# EAGLE board Simkb (EAGLE 6.6.0)
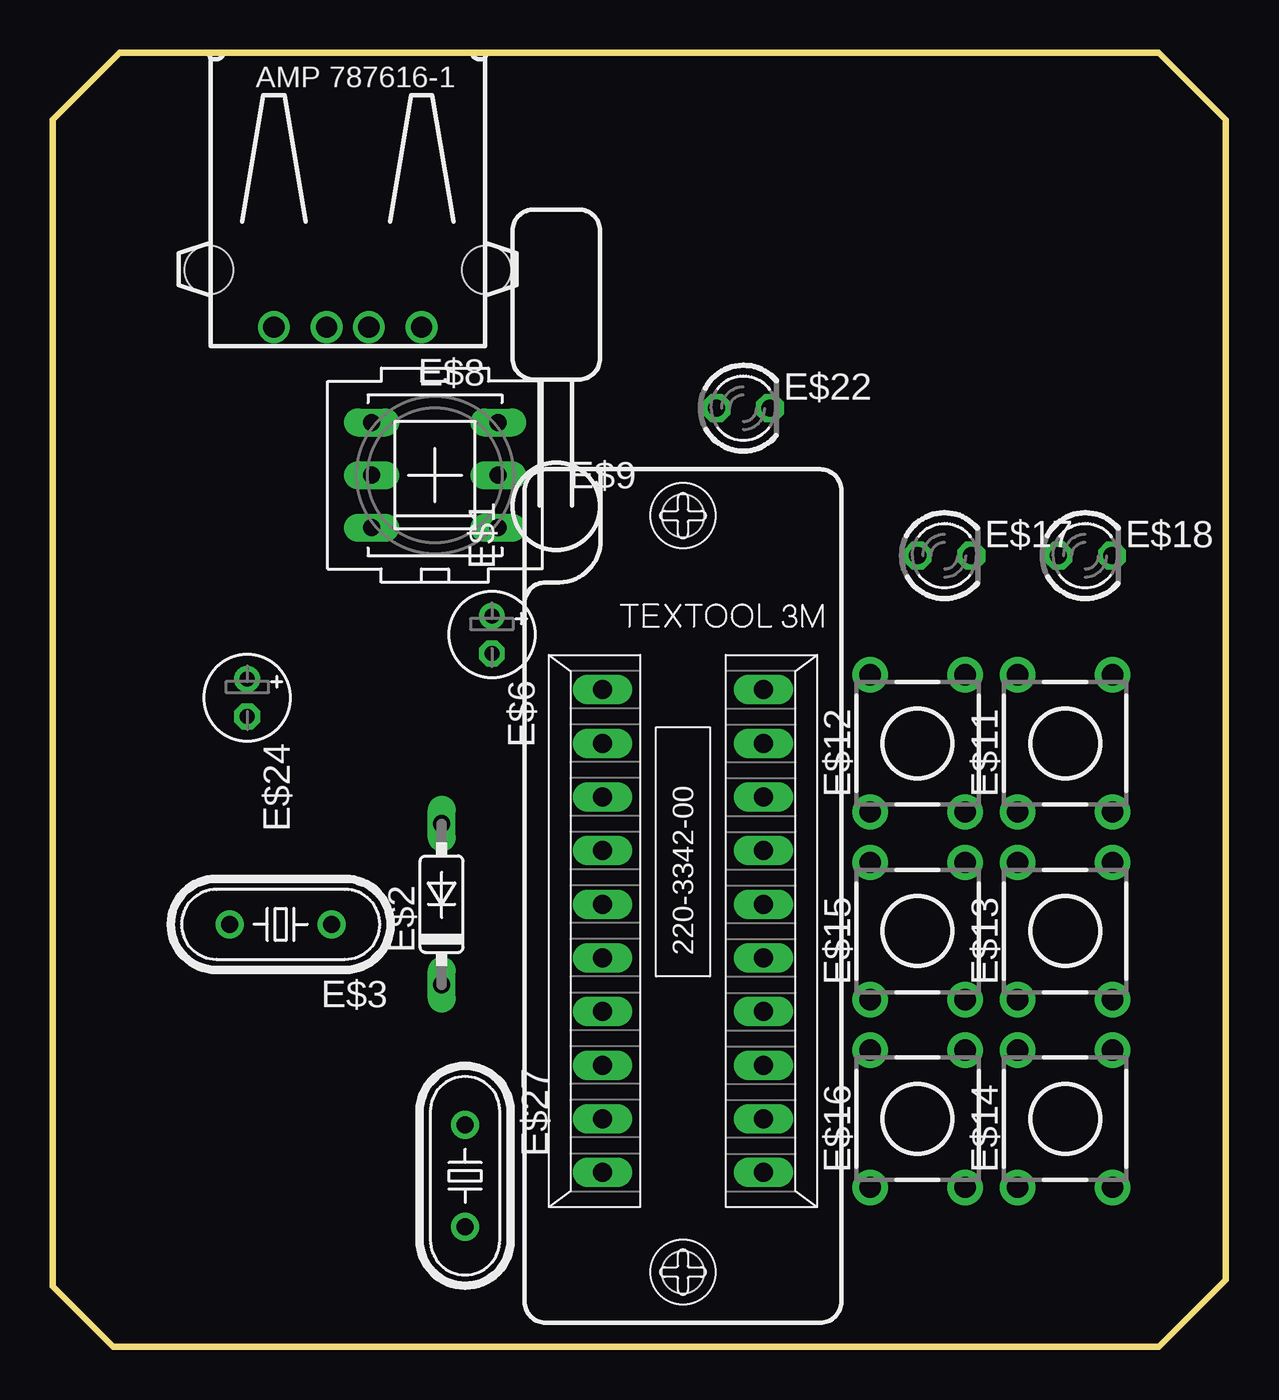
[diagram p0: board, top side]
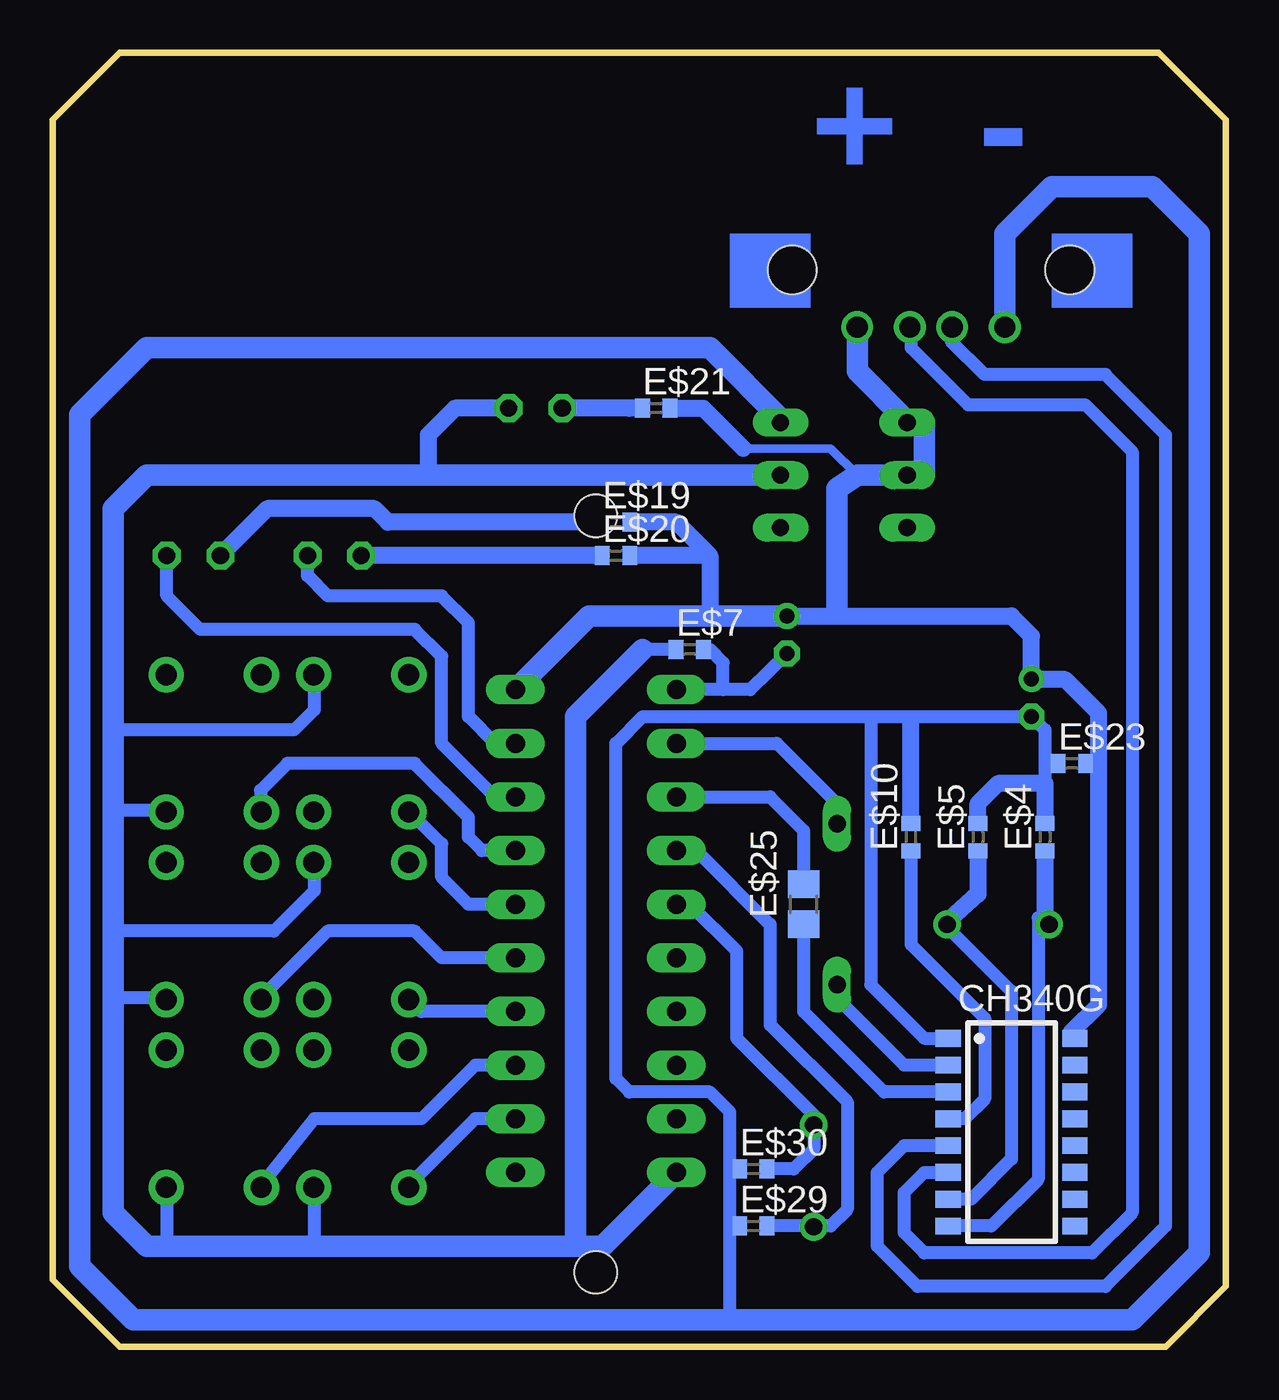
[diagram p1: board, bottom side, seen from below]

Size 55.56 x 61.28 mm. Coordinates in mm from the lower left corner, seen from the top.
Outline: 3.17,61.28 52.39,61.28 55.56,58.1 55.56,3.18 52.39,0 2.86,0 0,2.86 0,58.1 3.17,61.28
Copper layers (1*16): Top 0.035mm / dielectric 1.5mm / Bottom 0.035mm
Design rules "default": minimum track width 10mil, minimum drill 24mil, track to track 8mil, track to pad 8mil, pad to pad 8mil, via to via 8mil, smd to smd 8mil, copper to edge 40mil, drill to drill 8mil, minimum pad ring 10mil, minimum via ring 8mil, stop-mask expansion 4mil, vias tented up to drill 0mil, thermal gap 10mil
Net classes: 0 default: clearance 0.205 mm

## Footprints (pad centres in the part's own frame; a part is rotated, then mirrored left to right if it is on the bottom)
SOP16 = smd 0.8 x 1.2: 1 -4.445,-3; 2 -3.175,-3; 3 -1.905,-3; 4 -0.635,-3; 5 0.635,-3; 6 1.905,-3; 7 3.175,-3; 8 4.445,-3; 9 4.445,3; 10 3.175,3; 11 1.905,3; 12 0.635,3; 13 -0.635,3; 14 -1.905,3; 15 -3.175,3; 16 -4.445,3
220-3342-00-0602J = drill 0.9 long: 1 -11.43,-3.81; 2 -8.89,-3.81; 3 -6.35,-3.81; 4 -3.81,-3.81; 5 -1.27,-3.81; 6 1.27,-3.81; 7 3.81,-3.81; 8 6.35,-3.81; 9 8.89,-3.81; 10 11.43,-3.81; 11 11.43,3.81; 12 8.89,3.81; 13 6.35,3.81; 14 3.81,3.81; 15 1.27,3.81; 16 -1.27,3.81; 17 -3.81,3.81; 18 -6.35,3.81; 19 -8.89,3.81; 20 -11.43,3.81 | hole 2: 16.16,0; -19.66,0
DO35-7 = drill 0.813 long: A 3.81,0; C -3.81,0
HC49/S = drill 0.813: 1 -2.413,0; 2 2.413,0
C0402 = smd 0.7 x 0.9: 1 -0.65,0; 2 0.65,0
E1,8-4 = drill 0.711 pad 1.168: + -0.889,0 | drill 0.711 pad 1.168 octagon: - 0.889,0
R0402 = smd 0.7 x 0.9: 1 -0.65,0; 2 0.65,0
USB = drill 1: 1 -3.5,12.99; 2 -1,12.99; 3 1,12.99; 4 3.5,12.99 | hole 2.3: -6.57,10.28; 6.57,10.28
PVA2R = drill 0.813 long: 1 -2.997,2.489; 2 -2.997,0; 3 -2.997,-2.489; 4 2.997,2.489; 5 2.997,0; 6 2.997,-2.489
TL1105 = drill 1 pad 1.676: 1 -2.25,3.25; 2 2.25,3.25; 3 -2.25,-3.25; 4 2.25,-3.25
LED3MM = drill 0.813 octagon: A -1.27,0; K 1.27,0
C1005 = smd 0.7 x 0.9: 1 -0.65,0; 2 0.65,0
R0805 = smd 1.3 x 1.5: 1 -0.95,0; 2 0.95,0

## Placement (x,y rotation side)
CH340G  [SOP16]  10.16,10.16 270 bottom
E$1  [220-3342-00-0602J]  29.84,19.69 270 top
E$2  [DO35-7]  18.41,20.96 90 top
E$3  [HC49/S]  10.79,20 180 top
E$4  [C0402]  8.57,24.13 90 bottom
E$5  [C0402]  11.75,24.13 90 bottom
E$6  [E1,8-4]  20.8,33.72 270 top
E$7  [R0402]  25.4,33.02 0 bottom
E$8  [USB]  13.97,61.28 180 top
E$9  [PVA2R]  18.1,41.27 0 top
E$10  [C0402]  14.92,24.13 90 bottom
E$11  [TL1105]  47.94,28.57 0 top
E$12  [TL1105]  40.96,28.57 0 top
E$13  [TL1105]  47.94,19.69 0 top
E$14  [TL1105]  47.94,10.79 0 top
E$15  [TL1105]  40.96,19.69 0 top
E$16  [TL1105]  40.96,10.79 0 top
E$17  [LED3MM]  42.23,37.47 0 top
E$18  [LED3MM]  48.89,37.47 0 top
E$19  [R0402]  28.89,39.05 0 bottom
E$20  [R0402]  28.89,37.47 0 bottom
E$21  [R0402]  26.99,44.45 0 bottom
E$22  [LED3MM]  32.7,44.45 0 top
E$23  [C1005]  7.3,27.62 0 bottom
E$24  [E1,8-4]  9.21,30.73 270 top
E$25  [R0805]  20,20.96 90 bottom
E$27  [HC49/S]  19.53,8.1 270 top
E$29  [C0402]  22.38,5.71 0 bottom
E$30  [C0402]  22.38,8.41 0 bottom

## Library data of the parts
CH340G = relay
E$1 = con-3m
E$2 = diode
E$3 E$27 = crystal
E$4 E$5 E$7 E$10 E$19-E$21 E$23 E$25 E$29 E$30 = eagle-ltspice
E$6 E$24 = rcl
E$8 = con-amp
E$9 = switch-misc
E$11-E$16 = switch
E$17 E$18 E$22 = led

## Nets
S$11: E$17.A
S$13: E$17.K
S$15: E$1.4
S$19: E$18.K
S$20: E$18.A
S$21: E$22.A
S$23: E$2.A
S$25: E$2.C
S$27: E$6.-
S$28: E$22.K
S$30: E$6.+ E$24.+
S$31: E$1.5
S$32: E$24.-

## Tracks (layer width: path | path; a pad name or v marks a point on that pad's centre or on a via)
S$1
  Bottom 1.016: 20.95,43.81 24.45,47.31 51.12,47.31 54.29,44.13 54.29,3.81 51.75,1.27 4.45,1.27 1.27,4.45 1.27,52.7 3.49,54.93 8.26,54.93 10.48,52.7 10.48,48.26
S$2
  Bottom 1.016: 14.29,41.27 14.29,43.81 15.08,43.81 17.46,46.2 17.46,48.26
S$3
  Bottom 0.61: 8.89,20.32 8.89,7.94 11.11,5.72 13.33,5.72
S$4
  Bottom 0.61: 33.66,10.79 35.56,10.79 38.74,7.62
S$5
  Bottom 0.61: 33.66,13.34 35.56,13.34 38.1,10.79 43.18,10.79 45.72,7.62
S$6
  Bottom 0.61: 33.66,15.87 38.1,15.87 38.74,16.51
S$7
  Bottom 0.61: 33.66,18.41 37.15,18.41 38.42,19.69 42.55,19.69 45.72,16.51
S$8
  Bottom 0.61: 33.66,20.96 35.88,20.96 37.15,22.23 37.15,23.81 38.74,25.4
S$9
  Bottom 0.61: 33.66,23.5 35.24,23.5 35.88,24.13 35.88,25.08 38.42,27.62 44.45,27.62 45.72,26.35 45.72,25.4
S$10
  Bottom 0.406: 26.35,44.45 26.03,44.45 | 22.86,42.55 18.73,42.55 17.46,41.27
  Bottom 0.813: 26.03,44.45 25.72,44.45 24.76,44.45 22.86,42.55
  Bottom 1.016: 14.29,41.27 17.46,41.27 18.42,40.64 18.42,34.92
S$11
  Bottom 0.813: 29.85,37.47 E$17.A
S$12
  Bottom 0.61: 8.57,29.21 8.57,26.67
  Bottom 0.813: 11.75,24.92 11.75,25.72 10.79,26.67 8.57,26.67 8.57,24.92
S$13
  Bottom 0.61: 33.66,28.57 34.61,28.57 35.88,29.84 35.88,34.29 37.15,35.56 42.55,35.56 43.5,36.51 E$17.K
S$14
  Bottom 0.61: 26.03,26.03 21.59,26.03 20,24.45 20,22.07
S$15
  Bottom 0.61: E$1.4 25.08,23.5 21.59,20 21.59,15.24 17.94,11.59 17.94,6.51 18.73,5.72 21.59,5.72
S$16
  Bottom 0.61: 14.92,23.18 14.92,19.05 11.43,15.56 11.43,11.75 12.38,10.79 13.33,10.79
S$17
  Bottom 0.61: 13.02,48.26 13.02,47.62 11.43,46.04 5.71,46.04 2.86,43.18 2.86,5.72 5.71,2.86 14.6,2.86 16.51,4.76 16.51,8.26 15.24,9.52 13.65,9.52
S$18
  Bottom 0.61: 14.92,48.26 14.92,47.31 12.22,44.61 6.67,44.61 4.45,42.39 4.45,6.35 6.35,4.45 14.29,4.45 15.24,5.4 15.24,7.3 14.29,8.26 13.33,8.26
S$19
  Bottom 0.61: 34.61,26.03 37.15,28.57 37.15,32.7 38.42,33.97 48.58,33.97 50.17,35.56 E$18.K
S$20
  Bottom 0.813: 29.85,39.05 39.69,39.05 40.32,39.69 45.4,39.69 E$18.A
S$21
  Bottom 0.406: 27.62,44.45 27.94,44.45
  Bottom 0.813: E$22.A 28.26,44.45 27.94,44.45
S$22
  Bottom 0.61: 13.65,12.07 16.19,12.07 20,15.87 20,20.16
S$23
  Bottom 0.61: 26.03,28.57 21.27,28.57 18.42,25.72 E$2.A
S$24
  Bottom 0.61: 13.33,6.98 12.06,6.98 10.16,8.89 10.16,16.83 13.33,20
  Bottom 0.813: 11.75,23.34 11.75,21.43 13.33,20
S$25
  Bottom 0.61: E$2.C 18.42,16.51 15.24,13.34 13.33,13.34
S$26
  Bottom 0.813: 8.57,23.18 8.57,20
S$27
  Bottom 0.61: E$6.- 22.54,31.12 23.81,31.12 | 23.81,31.12 26.03,31.12 | 23.81,31.12 23.81,32.39 24.45,33.02
S$28
  Bottom 0.61: 43.18,31.75 43.18,30.16 44.13,29.21 52.7,29.21 | 43.18,22.86 43.18,21.59 45.09,19.69 52.7,19.69 | 50.17,25.4 52.7,25.4 | 50.17,16.51 52.7,16.51 | 43.18,7.62 43.18,4.76 | 50.17,7.62 50.17,4.76 | 26.03,33.02 27.62,33.02
  Bottom 0.813: E$22.K 36.51,44.45 37.78,43.18 37.78,41.27
  Bottom 1.016: 30.8,4.76 43.18,4.76 50.17,4.76 51.12,4.76 52.7,6.35 52.7,16.51 52.7,19.69 52.7,25.4 52.7,29.21 52.7,39.69 51.12,41.27 37.78,41.27 20.95,41.27 | 30.8,4.76 29.53,4.76 26.03,8.26 | 30.8,4.76 30.8,29.84 27.62,33.02
S$29
  Bottom 0.813: 14.92,25.08 14.92,29.69
S$30
  Bottom 0.813: 7.3,14.92 6.03,16.19 6.03,30 7.62,31.59 9.21,31.59 E$24.+ 9.21,33.66 10.16,34.61 E$6.+ | 27.94,39.05 26.03,39.05 24.45,37.47 | 24.45,37.47 27.94,37.47 | 24.45,37.47 24.45,34.61
  Bottom 1.016: 33.66,31.12 30.16,34.61 24.45,34.61 E$6.+
S$31
  Bottom 0.61: E$1.5 25.4,20.96 23.18,18.73 23.18,14.6 19.53,10.95 19.53,9.37 20.48,8.41 21.75,8.41
S$32
  Bottom 0.61: 16.83,29.84 16.83,17.14 14.29,14.6 13.65,14.6 | 16.83,29.84 27.62,29.84 28.89,28.57 28.89,12.7 28.26,12.07 24.45,12.07 23.49,11.11 23.49,1.27 | 8.57,29.21 E$24.- 16.83,29.84
(copper drawn outside any net)
  shapes: Bottom area x2

## Text on the board
Bottom: - | +
_tNames: E$1